# Altium PCB PCB.PcbDoc (part 7 of 11)
Units mm, origin at the board's own origin, x right, y up, seen from the top; angles counter-clockwise.
Board outline 100.46 x 70.51 mm, 10 copper layers (L1(SIG), L2(GND), L3(PWR), L4(SIG), L5(GND), L6(SIG), L7(GND), L8(SIG), L9(GND), L10(SIG)), stack 1.49 mm thick; 425 components, 324 nets, 2004 pads, 1425 vias.
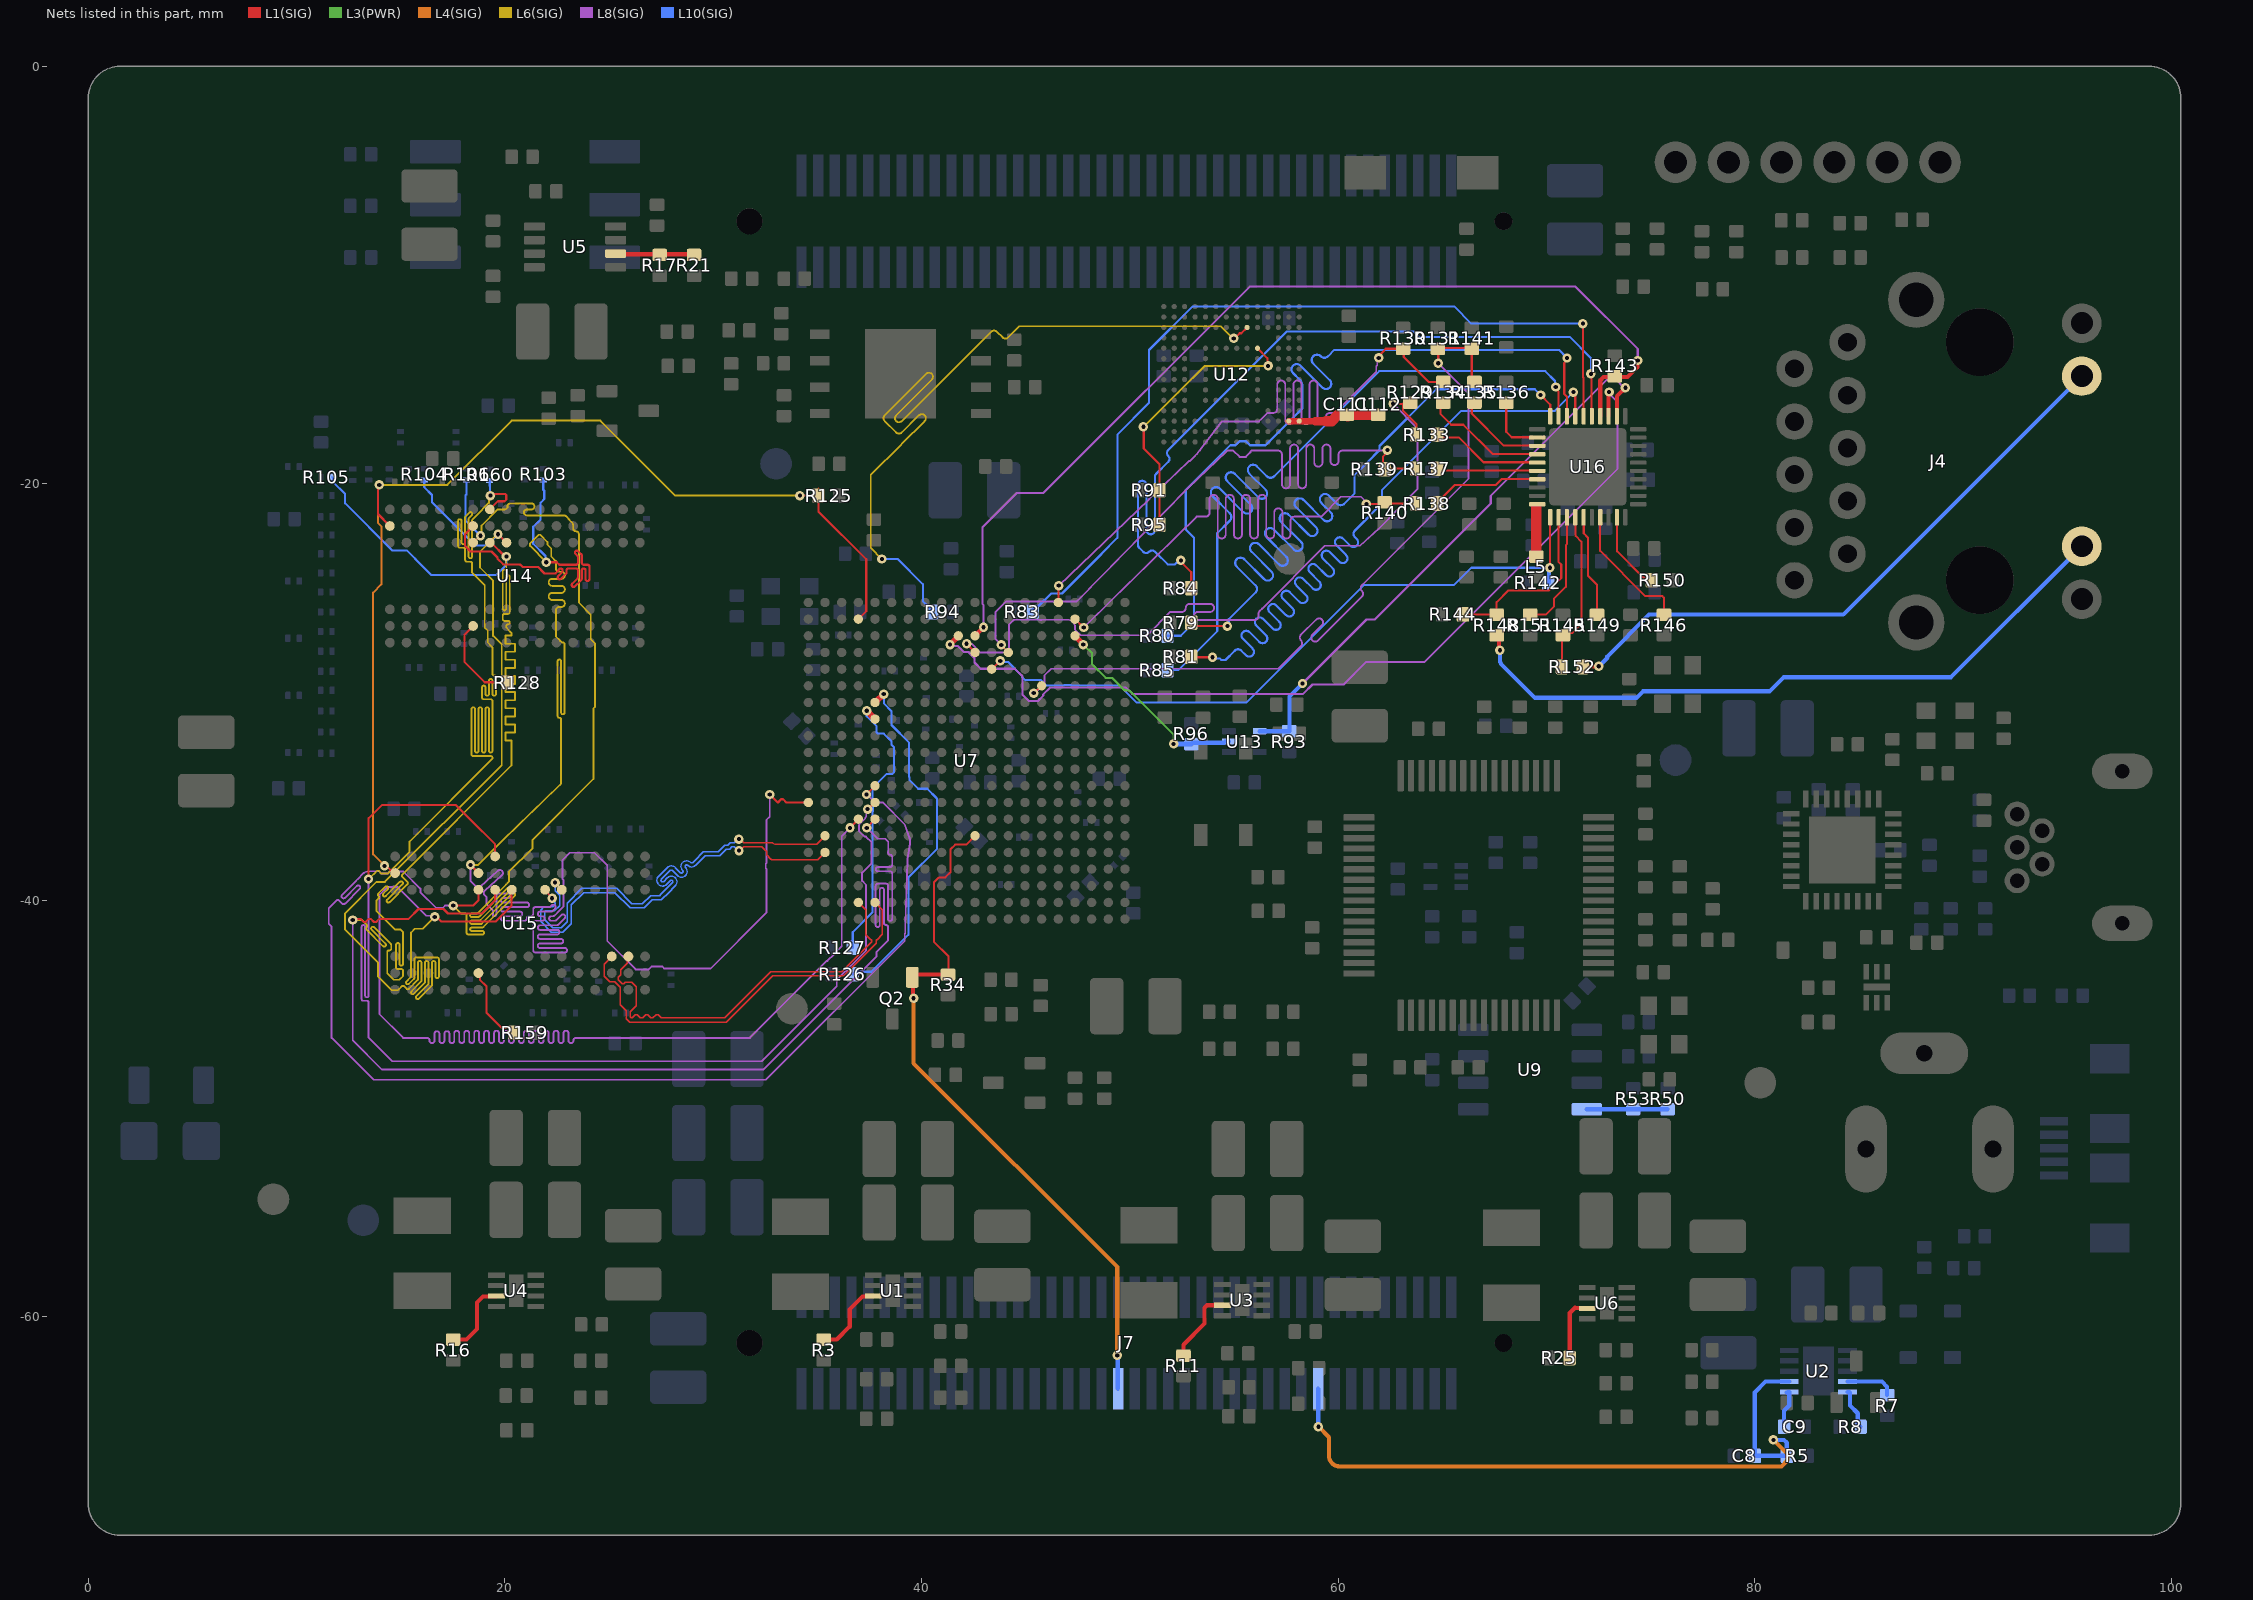
[diagram p14: the nets of this part, all layers, seen from the top]

## Via types
v1: diameter 0.45, hole 0.2, L1(SIG) to L10(SIG), tented both sides, 1194 vias
v2: diameter 0.45, hole 0.2, L1(SIG) to L10(SIG), 211 vias
v3: diameter 0.6, hole 0.25, L1(SIG) to L10(SIG), 9 vias
v4: diameter 0, hole 0.2, L1(SIG) to L10(SIG), tented both sides, 6 vias
v5: diameter 5, hole 3.2, L1(SIG) to L10(SIG), tented both sides, 4 vias
v6: diameter 0.45/0.45/0.45/0.45/0.45/0.45/0.45/0.45/0.45/0.45 (per signal layer), hole 0.2, L1(SIG) to L10(SIG), tented both sides, 1 vias

## Nets (pads, with @x,y where several pads share a name; then routed paths per layer and width w, separated by ;. In a path a pad name is that pad's centre, name@x,y a point inside that pad or via, vN(x,y) a via of type N, cw(c..) or ccw(c..) an arc to the next point about the centre after c; other vN are vias at no path point) (continued)
DDR_DQS2_N: U7.T2 U15.G3 | length 22.1
  L1(SIG) w0.069: U15.G3@21.933,-39.501 21.933,-39.54 22.267,-39.874 v1(22.267,-39.913) ; v1(31.243,-37.622) 31.295,-37.622 31.473,-37.445 32.326,-37.445 32.561,-37.68 32.561,-37.821 32.772,-38.031 32.785,-38.031 32.822,-38.069 35.011,-38.069 U7.T2@35.37,-37.71
  L10(SIG) w0.069: v1(22.267,-39.913) 22.267,-39.988 22.423,-40.144 22.423,-40.201 22.299,-40.324 21.872,-40.324 21.717,-40.479 21.717,-41.025 22.225,-41.533 22.778,-41.533 23.183,-41.128 23.183,-40.233 23.781,-39.634 25.279,-39.634 26.022,-40.376 26.683,-40.376 27.074,-39.986 27.505,-39.986 27.563,-39.929 27.833,-39.658 28.185,-39.307 ccw(c27.995,-39.115) 28.236,-38.994 ccw(c27.995,-39.115) 27.804,-38.924 27.622,-39.106 cw(c27.57,-39.053) 27.517,-39.106 cw(c27.57,-39.053) 27.517,-39 27.942,-38.575 cw(c27.995,-38.628) 28.047,-38.575 28.291,-38.82 ccw(c28.482,-38.628) 28.672,-38.82 ccw(c28.482,-38.628) 28.674,-38.438 ccw(c28.604,-38.507) 28.673,-38.437 cw(c28.725,-38.384) 28.672,-38.332 cw(c28.725,-38.384) 28.777,-38.331 ccw(c28.969,-38.141) 29.16,-38.332 29.253,-38.238 29.617,-37.874 30.315,-37.874 30.63,-37.559 30.788,-37.559 30.901,-37.447 31.012,-37.447 31.183,-37.617 v1@31.238,-37.617
DDR_DQS2_P: U7.R2 U15.F3 | length 22.2
  L1(SIG) w0.069: v1(22.412,-39.159) 22.412,-39.17 22.733,-39.491 U15.F3@22.733,-39.501 ; v1(31.237,-37.072) 31.29,-37.072 31.467,-37.249 32.856,-37.249 ccw(c33.059,-36.952) 32.869,-37.258 32.946,-37.313 34.967,-37.313 U7.R2@35.37,-36.91
  L10(SIG) w0.069: v1(22.412,-39.159) 22.412,-39.55 22.626,-39.764 22.626,-40.274 22.38,-40.52 21.953,-40.52 21.913,-40.56 21.913,-40.944 22.306,-41.337 22.697,-41.337 22.987,-41.047 22.987,-40.152 23.7,-39.438 25.36,-39.438 26.103,-40.181 26.602,-40.181 26.993,-39.79 27.424,-39.79 27.489,-39.725 28.047,-39.168 ccw(c27.995,-39.115) 28.061,-39.082 ccw(c27.995,-39.115) 27.942,-39.062 27.761,-39.243 cw(c27.57,-39.053) 27.379,-39.244 cw(c27.57,-39.053) 27.35,-38.896 27.35,-38.891 27.804,-38.437 cw(c27.995,-38.628) 28.185,-38.437 28.429,-38.681 ccw(c28.482,-38.628) 28.534,-38.681 ccw(c28.482,-38.628) 28.534,-38.576 cw(c28.725,-38.384) 28.533,-38.194 cw(c28.725,-38.384) 28.914,-38.192 cw(c28.846,-38.262) 28.916,-38.193 ccw(c28.969,-38.141) 29.021,-38.193 29.115,-38.1 29.536,-37.679 30.234,-37.679 30.549,-37.364 30.707,-37.364 30.82,-37.251 31.009,-37.251 31.165,-37.096 31.165,-37.072 v1(31.237,-37.072)
DDR_DQS3_N: U7.W4 U15.B7 | length 19.6
  L1(SIG) w0.069: U15.B7@25.933,-42.701 25.873,-42.761 25.873,-43.039 25.564,-43.348 25.564,-43.592 25.453,-43.702 25.453,-43.822 25.643,-44.011 25.7,-44.011 25.78,-43.931 26.086,-43.931 26.302,-44.148 26.302,-44.856 26.302,-45.071 26.022,-45.351 26.022,-45.601 26.075,-45.655 26.109,-45.655 26.259,-45.505 26.359,-45.505 26.509,-45.655 26.609,-45.655 26.759,-45.505 26.859,-45.505 27.009,-45.655 27.109,-45.655 27.259,-45.505 27.359,-45.505 27.509,-45.655 27.544,-45.655 30.549,-45.655 32.77,-43.434 36.181,-43.434 37.625,-41.989 37.625,-41.932 37.585,-41.892 37.57,-41.892 37.329,-41.651 37.329,-40.469 U7.W4@36.97,-40.11
DDR_DQS3_P: U7.W5 U15.C7 | length 19.6
  L1(SIG) w0.069: U15.C7@25.133,-42.701 24.764,-43.07 24.764,-43.654 25.026,-43.916 25.271,-43.916 25.533,-44.178 25.533,-45.015 25.826,-45.308 25.826,-45.683 25.994,-45.851 27.544,-45.851 30.63,-45.851 32.851,-43.63 36.262,-43.63 37.821,-42.07 37.821,-41.932 37.861,-41.892 37.868,-41.892 38.129,-41.63 38.129,-40.469 U7.W5@37.77,-40.11
DDR_NCAS: R105.1 U7.P5 U14.K3 U15.K3 | length 119.7
  L1(SIG) w0.103: v1(12.697,-40.951) 12.75,-40.898 12.967,-40.898 13.069,-40.898 13.219,-41.048 13.319,-41.048 13.469,-40.898 13.569,-40.898 13.719,-41.048 13.819,-41.048 13.969,-40.898 14.097,-40.898 15.379,-40.898 15.854,-40.423 17.051,-40.423 17.272,-40.644 18.884,-40.644 19.533,-39.995 U15.K3@19.533,-39.501 ; U14.K3@19.279,-22.839 19.342,-22.839 20.009,-23.505 v1(20.073,-23.505) ; v1(37.37,-36.532) 37.37,-36.521 37.759,-36.132 U7.P5@37.759,-36.11
  L6(SIG) w0.088: v1(12.697,-40.951) 13.134,-40.951 13.335,-41.152 13.366,-41.183 cw(c13.307,-41.242) 13.366,-41.301 ccw(c13.425,-41.36) 13.365,-41.419 14.151,-42.205 ccw(c14.21,-42.146) 14.27,-42.205 ccw(c14.21,-42.145) 14.27,-42.086 13.603,-41.42 cw(c13.662,-41.36) 13.603,-41.301 cw(c13.662,-41.36) 13.721,-41.301 14.521,-42.101 cw(c14.462,-42.16) 14.546,-42.16 14.546,-42.328 cw(c14.462,-42.328) 14.462,-42.412 14.435,-42.412 ccw(c14.435,-42.496) 14.351,-42.496 14.351,-42.54 14.351,-43.516 14.656,-43.822 14.729,-43.822 14.732,-43.819 14.935,-43.819 15.113,-43.64 15.113,-43.438 15.113,-43.394 ccw(c15.029,-43.394) 15.029,-43.31 14.862,-43.31 cw(c14.862,-43.226) 14.778,-43.226 14.778,-42.142 cw(c14.862,-42.142) 14.862,-42.058 cw(c14.862,-42.142) 14.945,-42.142 14.945,-43.059 ccw(c15.029,-43.059) 15.029,-43.142 ccw(c15.029,-43.059) 15.113,-43.059 15.113,-42.014 15.113,-41.533 14.986,-41.406 14.718,-41.406 13.843,-40.53 13.843,-40.009 13.902,-39.95 13.933,-39.919 ccw(c13.873,-39.86) 13.932,-39.8 cw(c13.992,-39.741) 13.932,-39.682 14.258,-39.356 cw(c14.318,-39.416) 14.377,-39.356 cw(c14.318,-39.416) 14.377,-39.475 14.169,-39.682 ccw(c14.229,-39.741) 14.17,-39.801 ccw(c14.229,-39.741) 14.288,-39.801 14.965,-39.124 cw(c15.024,-39.183) 15.083,-39.124 cw(c15.024,-39.183) 15.083,-39.243 14.351,-39.975 ccw(c14.41,-40.034) 14.351,-40.093 ccw(c14.41,-40.034) 14.469,-40.093 15.32,-39.242 ccw(c15.261,-39.183) 15.321,-39.125 15.083,-38.887 cw(c15.142,-38.828) 15.083,-38.769 15.114,-38.738 20.32,-33.532 20.32,-32.383 20.32,-32.339 20.035,-32.339 20.035,-31.952 20.481,-31.952 20.481,-31.564 20.035,-31.564 20.035,-31.177 20.481,-31.177 20.481,-30.789 20.035,-30.789 20.035,-30.401 20.481,-30.401 20.481,-30.014 20.035,-30.014 20.035,-29.626 20.481,-29.626 20.481,-29.239 20.035,-29.239 20.035,-28.851 20.481,-28.851 20.481,-28.463 20.035,-28.463 20.035,-28.076 20.481,-28.076 20.481,-27.688 20.032,-27.688 20.032,-27.301 20.32,-27.301 20.32,-27.182 20.295,-27.157 20.244,-27.105 20.089,-26.917 ccw(c19.804,-27.151) 20.066,-26.891 20.066,-26.889 20.066,-26.846 cw(c20.15,-26.846) 20.15,-26.762 ccw(c20.15,-26.678) 20.234,-26.678 ccw(c20.15,-26.678) 20.15,-26.594 19.982,-26.594 cw(c19.982,-26.51) 19.898,-26.51 19.898,-26.343 cw(c19.982,-26.343) 19.982,-26.259 20.15,-26.259 ccw(c20.15,-26.175) 20.234,-26.175 20.234,-24.486 ccw(c20.15,-24.486) 20.15,-24.402 ccw(c20.15,-24.486) 20.066,-24.486 20.066,-26.008 cw(c19.982,-26.008) 19.982,-26.091 cw(c19.982,-26.008) 19.898,-26.008 19.898,-24.222 cw(c19.982,-24.222) 19.982,-24.139 ccw(c19.982,-24.055) 20.066,-24.055 20.066,-24.011 20.066,-23.512 v1(20.073,-23.505)
  L8(SIG) w0.088: v1(12.697,-40.951) 12.697,-46.731 14.102,-48.137 32.409,-48.137 37.846,-42.7 37.846,-42.485 38.396,-41.934 38.396,-41.335 38.396,-41.291 ccw(c38.297,-41.291) 38.297,-41.192 cw(c38.297,-41.093) 38.198,-41.093 38.198,-39.506 ccw(c38.099,-39.506) 38.099,-39.407 ccw(c38.099,-39.506) 38,-39.506 38,-41.192 cw(c37.901,-41.192) 37.901,-41.291 cw(c37.901,-41.192) 37.802,-41.192 37.802,-39.308 cw(c37.901,-39.308) 37.901,-39.209 38.297,-39.209 cw(c38.297,-39.308) 38.396,-39.308 38.396,-40.895 ccw(c38.496,-40.895) 38.496,-40.994 ccw(c38.496,-40.895) 38.595,-40.895 38.595,-38.713 ccw(c38.496,-38.713) 38.496,-38.614 37.901,-38.614 cw(c37.901,-38.515) 37.901,-38.416 38.496,-38.416 ccw(c38.496,-38.317) 38.595,-38.317 38.595,-37.92 ccw(c38.496,-37.92) 38.496,-37.821 cw(c38.496,-37.722) 38.396,-37.722 38.396,-37.678 ; v1(37.37,-36.532) 37.891,-37.053 38.257,-37.053 38.408,-37.204 38.408,-37.667 38.396,-37.679
  L10(SIG) w0.103: R105.1@11.708,-19.691 11.761,-19.745 11.761,-19.932 12.332,-20.504 12.332,-20.945 14.607,-23.22 15.309,-23.22 15.697,-23.608 15.697,-23.622 16.458,-24.383 19.596,-24.383 20.066,-23.913 20.066,-23.512 v1(20.073,-23.505)
DDR_NCS: R103.1 U7.N1 U14.L2 U15.L2 | length 107.2
  L1(SIG) w0.103: v1(18.348,-38.308) 18.348,-38.312 18.733,-38.696 U15.L2@18.733,-38.701 ; U14.L2@18.479,-22.039 18.092,-22.425 18.092,-22.999 18.354,-23.26 19.359,-23.26 19.649,-23.551 19.649,-23.614 19.917,-23.882 19.98,-23.882 19.982,-23.884 20.73,-23.884 20.848,-24.002 21.589,-24.002 21.857,-24.27 21.893,-24.307 ccw(c21.951,-24.235) 21.95,-24.327 22.383,-24.327 ccw(c22.383,-24.235) 22.448,-24.3 22.565,-24.183 ccw(c22.5,-24.119) 22.578,-24.166 22.603,-24.125 cw(c22.682,-24.172) 22.683,-24.081 cw(c22.683,-24.172) 22.775,-24.172 22.775,-24.195 cw(c22.683,-24.195) 22.748,-24.259 22.564,-24.443 ccw(c22.629,-24.508) 22.564,-24.572 ccw(c22.629,-24.508) 22.694,-24.573 22.931,-24.335 ccw(c22.866,-24.271) 22.958,-24.271 22.958,-24.172 cw(c23.05,-24.172) 23.05,-24.081 23.417,-24.081 cw(c23.417,-24.172) 23.508,-24.172 23.508,-24.499 cw(c23.417,-24.499) 23.482,-24.563 23.239,-24.806 ccw(c23.304,-24.871) 23.239,-24.935 ccw(c23.304,-24.871) 23.369,-24.935 23.665,-24.639 ccw(c23.6,-24.574) 23.692,-24.574 23.692,-24.172 cw(c23.783,-24.172) 23.783,-24.081 cw(c23.783,-24.172) 23.875,-24.172 23.875,-24.589 ccw(c23.967,-24.589) 23.967,-24.681 ccw(c23.967,-24.589) 24.059,-24.589 24.059,-23.989 ccw(c23.967,-23.989) 23.967,-23.897 23.783,-23.897 cw(c23.783,-23.806) 23.692,-23.806 23.692,-23.459 ccw(c23.6,-23.459) 23.665,-23.394 23.52,-23.249 ccw(c23.454,-23.313) 23.39,-23.248 ccw(c23.454,-23.313) 23.389,-23.378 23.482,-23.47 cw(c23.417,-23.535) 23.508,-23.535 23.508,-23.806 cw(c23.417,-23.806) 23.417,-23.897 22.65,-23.897 cw(c22.65,-23.806) 22.585,-23.87 22.535,-23.82 22.498,-23.784 22.492,-23.777 v1(21.989,-23.777) ; v1(32.717,-34.927) 32.813,-35.022 33.1,-35.31 33.11,-35.31 33.26,-35.16 33.36,-35.16 33.51,-35.31 34.29,-35.31 U7.N1@34.57,-35.31
  L6(SIG) w0.088: v1(18.348,-38.308) 18.713,-38.308 19.871,-37.15 22.649,-34.466 22.7,-34.414 22.7,-31.373 22.7,-31.329 ccw(c22.617,-31.329) 22.617,-31.245 cw(c22.617,-31.161) 22.533,-31.161 22.533,-28.533 cw(c22.617,-28.533) 22.617,-28.449 cw(c22.617,-28.533) 22.7,-28.533 22.7,-30.994 ccw(c22.784,-30.994) 22.784,-31.077 ccw(c22.784,-30.994) 22.868,-30.994 22.868,-27.715 ccw(c22.784,-27.715) 22.784,-27.632 22.77,-27.632 cw(c22.77,-27.548) 22.709,-27.605 22.678,-27.572 ccw(c22.617,-27.629) 22.676,-27.57 22.668,-27.561 22.637,-27.53 22.449,-27.343 22.449,-26.504 22.449,-26.095 cw(c22.618,-26.095) 22.618,-25.926 22.714,-25.926 ccw(c22.714,-25.757) 22.714,-25.588 22.272,-25.588 cw(c22.272,-25.42) 22.272,-25.251 22.714,-25.251 ccw(c22.714,-25.082) 22.714,-24.913 22.272,-24.913 cw(c22.272,-24.744) 22.272,-24.576 22.714,-24.576 ccw(c22.714,-24.407) 22.714,-24.238 22.618,-24.238 cw(c22.618,-24.069) 22.449,-24.069 22.449,-24.025 ; v1(21.989,-23.777) 21.209,-22.997 21.209,-22.864 21.617,-22.455 21.69,-22.455 22.047,-22.813 22.047,-22.94 22.225,-23.118 22.225,-23.502 22.449,-23.726 22.449,-24.017
  L8(SIG) w0.088: v1(18.348,-38.308) 18.348,-38.593 18.348,-39.074 18.622,-39.348 ccw(c18.724,-39.246) 18.821,-39.353 19.665,-38.59 cw(c19.762,-38.697) 19.869,-38.6 cw(c19.762,-38.697) 19.859,-38.804 19.036,-39.547 ccw(c19.132,-39.654) 19.03,-39.756 19.115,-39.84 19.115,-40.194 19.126,-40.205 19.438,-40.517 ; 19.169,-40.248 19.438,-40.517 ; v1(32.717,-34.927) 32.717,-35.994 32.558,-36.153 32.558,-38.221 32.522,-38.256 32.522,-38.459 32.558,-38.494 32.558,-40.598 32.532,-40.624 29.872,-43.284 27.659,-43.284 27.569,-43.193 27.041,-43.193 26.912,-43.323 26.276,-43.323 24.916,-41.962 24.916,-38.334 24.304,-37.723 23.114,-37.723 22.772,-38.065 22.772,-38.997 22.808,-39.033 22.808,-40.315 22.782,-40.341 22.669,-40.453 22.638,-40.484 22.384,-40.739 cw(c22.307,-40.661) 22.307,-40.771 22.231,-40.771 ccw(c22.231,-40.88) 22.231,-40.989 22.397,-40.989 ccw(c22.397,-40.88) 22.474,-40.957 22.716,-40.715 cw(c22.793,-40.793) 22.87,-40.87 22.565,-41.175 cw(c22.488,-41.098) 22.488,-41.207 21.69,-41.207 ccw(c21.69,-41.316) 21.69,-41.425 22.514,-41.425 cw(c22.514,-41.535) 22.514,-41.644 21.69,-41.644 ccw(c21.69,-41.753) 21.69,-41.862 22.695,-41.862 cw(c22.695,-41.971) 22.804,-41.971 cw(c22.695,-41.971) 22.695,-42.08 21.69,-42.08 ccw(c21.69,-42.189) 21.581,-42.189 ccw(c21.69,-42.189) 21.69,-42.298 22.876,-42.298 cw(c22.876,-42.408) 22.985,-42.408 cw(c22.876,-42.408) 22.876,-42.517 21.471,-42.517 cw(c21.471,-42.408) 21.362,-42.408 21.362,-41.098 cw(c21.471,-41.098) 21.471,-40.989 21.794,-40.989 ccw(c21.794,-40.88) 21.794,-40.771 21.69,-40.771 cw(c21.69,-40.661) 21.69,-40.552 22.216,-40.552 ccw(c22.216,-40.443) 22.293,-40.521 22.326,-40.488 22.407,-40.407 ccw(c22.33,-40.33) 22.253,-40.252 22.203,-40.302 cw(c22.126,-40.225) 22.126,-40.334 21.471,-40.334 ccw(c21.471,-40.443) 21.362,-40.443 21.362,-40.661 cw(c21.253,-40.661) 21.253,-40.771 21.209,-40.771 21.165,-40.771 ccw(c21.165,-40.88) 21.056,-40.88 cw(c20.947,-40.88) 20.947,-40.989 19.919,-40.989 cw(c19.919,-40.88) 19.919,-40.771 20.728,-40.771 ccw(c20.728,-40.661) 20.728,-40.552 19.919,-40.552 cw(c19.919,-40.443) 19.81,-40.443 cw(c19.919,-40.443) 19.919,-40.334 21.056,-40.334 ccw(c21.056,-40.225) 21.165,-40.225 ccw(c21.056,-40.225) 21.056,-40.116 19.919,-40.116 cw(c19.919,-40.007) 19.919,-39.898 20.164,-39.898 ccw(c20.164,-39.788) 20.274,-39.788 ccw(c20.164,-39.788) 20.164,-39.679 19.701,-39.679 ccw(c19.701,-39.788) 19.592,-39.788 19.592,-40.661 cw(c19.483,-40.661) 19.483,-40.771 19.438,-40.771 19.438,-40.517
  L10(SIG) w0.103: R103.1@21.844,-19.837 21.844,-20.297 21.894,-20.347 21.894,-20.746 21.717,-20.923 21.717,-21.724 21.366,-22.075 21.366,-22.895 21.953,-23.482 21.953,-23.741 v1(21.989,-23.777)
DDR_NRAS: R104.1 U7.P4 U14.J3 U15.J3 | length 111.1
  L1(SIG) w0.103: v1(16.632,-40.803) 16.726,-40.803 16.948,-41.025 19.558,-41.025 20.326,-40.256 20.326,-39.507 U15.J3@20.333,-39.501 ; v1@19.679,-22.439 U14.J3@20.079,-22.839 ; v1(36.57,-36.532) 36.57,-36.521 36.959,-36.132 U7.P4@36.959,-36.11
  L6(SIG) w0.088: v1(16.632,-40.803) 16.062,-41.373 15.68,-41.373 15.494,-41.558 15.494,-42.625 15.494,-43.651 cw(c15.41,-43.651) 15.47,-43.71 15.282,-43.898 ccw(c15.341,-43.957) 15.282,-44.017 ccw(c15.341,-43.957) 15.4,-44.016 15.637,-43.779 ccw(c15.578,-43.72) 15.662,-43.72 15.662,-42.836 cw(c15.745,-42.836) 15.745,-42.753 16.751,-42.753 cw(c16.751,-42.836) 16.835,-42.836 16.835,-43.662 cw(c16.751,-43.662) 16.751,-43.745 cw(c16.751,-43.662) 16.667,-43.662 16.667,-43.004 ccw(c16.583,-43.004) 16.583,-42.92 ccw(c16.583,-43.004) 16.5,-43.004 16.5,-44.067 cw(c16.416,-44.067) 16.475,-44.126 15.874,-44.727 cw(c15.815,-44.668) 15.756,-44.727 cw(c15.815,-44.668) 15.756,-44.609 16.308,-44.057 ccw(c16.248,-43.998) 16.332,-43.998 16.332,-43.004 ccw(c16.248,-43.004) 16.248,-42.92 ccw(c16.248,-43.004) 16.164,-43.004 16.164,-43.928 cw(c16.081,-43.928) 16.14,-43.987 15.637,-44.49 cw(c15.578,-44.431) 15.519,-44.49 cw(c15.578,-44.431) 15.519,-44.372 15.972,-43.918 ccw(c15.913,-43.859) 15.997,-43.859 15.997,-43.004 ccw(c15.913,-43.004) 15.913,-42.92 ccw(c15.913,-43.004) 15.829,-43.004 15.829,-43.79 cw(c15.745,-43.79) 15.805,-43.849 15.4,-44.253 cw(c15.341,-44.194) 15.282,-44.254 15.166,-44.137 ccw(c15.107,-44.197) 15.048,-44.138 15.017,-44.169 14.859,-44.327 14.567,-44.327 13.917,-43.677 13.917,-43.004 12.328,-41.415 12.328,-40.634 13.838,-39.125 14.243,-39.125 19.848,-33.52 19.848,-27.725 19.435,-27.313 19.435,-24.659 18.808,-24.032 18.808,-23.274 19.644,-22.439 v1(19.671,-22.439)
  L8(SIG) w0.088: v1(16.632,-40.803) 16.575,-40.745 16.231,-40.745 14.859,-39.374 14.351,-39.374 13.982,-39.743 13.982,-45.481 15.113,-46.613 16.048,-46.613 16.264,-46.613 cw(c16.264,-46.732) 16.383,-46.732 16.383,-46.741 ccw(c16.503,-46.741) 16.622,-46.741 16.622,-46.412 cw(c16.741,-46.412) 16.86,-46.412 16.86,-46.741 ccw(c16.979,-46.741) 17.098,-46.741 17.098,-46.409 cw(c17.217,-46.409) 17.337,-46.409 17.337,-46.741 ccw(c17.456,-46.741) 17.575,-46.741 17.575,-46.387 cw(c17.694,-46.387) 17.813,-46.387 17.813,-46.741 ccw(c17.932,-46.741) 18.051,-46.741 18.051,-46.387 cw(c18.17,-46.387) 18.29,-46.387 18.29,-46.741 ccw(c18.409,-46.741) 18.528,-46.741 18.528,-46.387 cw(c18.647,-46.387) 18.766,-46.387 18.766,-46.741 ccw(c18.885,-46.741) 19.004,-46.741 19.004,-46.387 cw(c19.124,-46.387) 19.243,-46.387 19.243,-46.741 ccw(c19.362,-46.741) 19.481,-46.741 19.481,-46.387 cw(c19.6,-46.387) 19.719,-46.387 19.719,-46.741 ccw(c19.838,-46.741) 19.957,-46.741 19.957,-46.387 cw(c20.077,-46.387) 20.196,-46.387 20.196,-46.741 ccw(c20.315,-46.741) 20.434,-46.741 20.434,-46.387 cw(c20.553,-46.387) 20.672,-46.387 20.672,-46.741 ccw(c20.791,-46.741) 20.911,-46.741 20.911,-46.387 cw(c21.03,-46.387) 21.149,-46.387 21.149,-46.741 ccw(c21.268,-46.741) 21.387,-46.741 21.387,-46.387 cw(c21.506,-46.387) 21.625,-46.387 21.625,-46.741 ccw(c21.744,-46.741) 21.864,-46.741 21.864,-46.387 cw(c21.983,-46.387) 22.102,-46.387 22.102,-46.741 ccw(c22.221,-46.741) 22.34,-46.741 22.34,-46.387 cw(c22.459,-46.387) 22.578,-46.387 22.578,-46.741 ccw(c22.698,-46.741) 22.817,-46.741 22.817,-46.387 cw(c22.936,-46.387) 23.055,-46.387 23.055,-46.741 ccw(c23.174,-46.741) 23.293,-46.741 23.293,-46.732 cw(c23.412,-46.732) 23.412,-46.613 23.456,-46.613 31.762,-46.613 35.459,-42.916 35.487,-42.916 35.814,-42.589 35.814,-42.561 36.172,-42.203 36.172,-36.93 v1(36.57,-36.532)
  L10(SIG) w0.103: R104.1@16.129,-19.837 16.129,-20.172 16.506,-20.549 16.506,-20.9 18.584,-22.978 19.131,-22.978 v1(19.671,-22.439)
DDR_NRST: R125.1 U7.B4 U14.T2 U15.T2 | length 52.9
  L1(SIG) w0.103: v1(13.97,-20.066) 13.906,-20.13 13.906,-21.466 U14.T2@14.479,-22.039 ; v1(14.224,-38.354) 14.305,-38.354 14.652,-38.701 U15.T2@14.733,-38.701 ; v1(34.163,-20.578) R125.1@35.06,-20.578 ; R125.1@35.06,-20.253 R125.1@35.06,-20.578 ; U7.B4@36.97,-26.51 37.347,-26.133 37.347,-23.634 35.06,-21.348 R125.1@35.06,-20.578
  L4(SIG) w0.092: v1(13.97,-20.066) 13.906,-20.13 13.906,-21.889 14.071,-22.054 14.071,-24.844 13.675,-25.24 13.675,-37.805 v1(14.224,-38.354)
  L6(SIG) w0.088: v1(13.97,-20.066) 17.239,-20.066 20.326,-16.979 24.586,-16.979 28.184,-20.578 v1(34.163,-20.578)
DDR_NWE: R106.1 U7.M5 U14.L3 U15.L3 | length 104.7
  L1(SIG) w0.103: v1(17.526,-40.263) 17.53,-40.258 18.484,-40.258 18.733,-40.01 U15.L3@18.733,-39.501 ; U14.L3@18.479,-22.839 18.487,-22.839 18.82,-22.506 v1(18.829,-22.506) ; v1(37.364,-34.925) 37.364,-34.921 37.759,-34.526 U7.M5@37.759,-34.51
  L6(SIG) w0.088: v1(17.526,-40.263) 17.907,-40.644 18.035,-40.644 18.079,-40.644 cw(c18.079,-40.727) 18.163,-40.727 18.163,-41.565 ccw(c18.246,-41.565) 18.246,-41.649 18.922,-41.649 ccw(c18.922,-41.565) 19.006,-41.565 ccw(c18.922,-41.565) 18.922,-41.482 18.414,-41.482 cw(c18.414,-41.398) 18.33,-41.398 cw(c18.414,-41.398) 18.414,-41.314 18.912,-41.314 ccw(c18.912,-41.23) 18.971,-41.29 20.471,-39.79 ccw(c20.412,-39.73) 20.471,-39.671 ccw(c20.412,-39.73) 20.353,-39.671 18.902,-41.122 cw(c18.843,-41.063) 18.843,-41.146 18.414,-41.146 cw(c18.414,-41.063) 18.33,-41.063 cw(c18.414,-41.063) 18.414,-40.979 18.773,-40.979 ccw(c18.773,-40.895) 18.832,-40.955 20.234,-39.552 ccw(c20.175,-39.493) 20.234,-39.434 ccw(c20.175,-39.493) 20.116,-39.434 18.763,-40.787 cw(c18.704,-40.727) 18.704,-40.811 18.414,-40.811 cw(c18.414,-40.727) 18.33,-40.727 cw(c18.414,-40.727) 18.414,-40.644 18.634,-40.644 ccw(c18.634,-40.56) 18.693,-40.619 20.056,-39.256 20.147,-39.166 20.193,-39.12 20.193,-38.644 21.335,-37.502 21.335,-37.102 24.257,-34.18 24.257,-30.793 24.321,-30.729 24.321,-27.669 24.127,-27.475 24.127,-26.29 23.558,-25.721 23.558,-22.483 23.558,-22.439 ccw(c23.415,-22.439) 23.424,-22.295 23.415,-22.295 cw(c23.424,-22.151) 23.28,-22.151 23.28,-21.993 ccw(c23.137,-21.993) 23.239,-21.891 23.105,-21.758 cw(c23.207,-21.657) 23.092,-21.743 23.056,-21.694 ccw(c22.941,-21.781) 23.042,-21.679 22.937,-21.574 ccw(c22.836,-21.676) 22.836,-21.532 21.061,-21.532 cw(c21.061,-21.388) 20.917,-21.388 cw(c21.061,-21.388) 21.061,-21.244 21.277,-21.244 ccw(c21.277,-21.101) 21.421,-21.101 ccw(c21.277,-21.101) 21.277,-20.957 20.27,-20.957 ccw(c20.27,-21.101) 20.127,-21.101 cw(c19.983,-21.101) 19.983,-21.244 19.939,-21.244 19.653,-21.244 18.879,-22.019 18.879,-22.455 v1(18.829,-22.506)
  L8(SIG) w0.088: v1(17.526,-40.263) 17.128,-40.263 17.013,-40.377 16.708,-40.377 15.944,-39.614 15.944,-39.443 15.151,-38.649 15.125,-38.623 14.479,-38.621 14.377,-38.723 14.071,-38.723 13.967,-38.619 13.458,-38.617 ccw(c13.455,-38.986) 13.187,-38.732 12.953,-38.979 12.853,-39.079 12.822,-39.11 12.188,-39.744 ccw(c12.258,-39.814) 12.188,-39.885 ccw(c12.258,-39.814) 12.328,-39.885 12.892,-39.321 cw(c12.962,-39.391) 13.032,-39.321 cw(c12.962,-39.391) 13.033,-39.461 12.328,-40.165 cw(c12.258,-40.095) 12.188,-40.165 12.048,-40.024 ccw(c11.978,-40.095) 11.908,-40.025 11.877,-40.056 11.543,-40.389 11.543,-41.131 11.684,-41.271 11.684,-46.613 13.696,-48.625 32.532,-48.625 39.171,-41.986 39.196,-41.96 39.333,-38.117 ccw(c38.964,-38.104) 39.332,-38.075 39.332,-38.072 39.332,-38.043 39.454,-37.285 39.454,-37.082 39.196,-36.368 38.138,-35.31 37.748,-35.31 v1(37.364,-34.925)
  L10(SIG) w0.103: R106.1@18.161,-19.837 18.156,-19.841 18.156,-20.524 18.117,-20.564 18.117,-21.794 v1(18.829,-22.506)
DDR_ODT: R160.1 U7.N5 U14.K1 U15.K1 | length 111.8
  L1(SIG) w0.103: v1(13.455,-38.986) 13.462,-38.979 13.462,-36.072 14.097,-35.437 17.653,-35.437 18.352,-36.135 19.533,-37.317 U15.K1@19.533,-37.901 ; U14.K1@19.292,-21.226 U14.K1@19.279,-21.239 19.666,-20.852 19.985,-20.852 20.066,-20.771 20.066,-20.56 20.005,-20.5 19.538,-20.5 19.526,-20.511 19.37,-20.511 v1(19.304,-20.578) ; v1(37.416,-35.632) 37.431,-35.632 37.754,-35.31 U7.N5@37.759,-35.31
  L6(SIG) w0.088: v1(13.455,-38.986) 13.745,-38.709 13.862,-38.592 13.941,-38.592 14.071,-38.723 14.377,-38.723 15.428,-37.671 15.428,-37.184 19.405,-33.207 19.405,-33.163 ccw(c19.321,-33.163) 19.321,-33.08 18.483,-33.08 cw(c18.483,-32.996) 18.399,-32.996 18.399,-30.826 cw(c18.483,-30.826) 18.483,-30.742 cw(c18.483,-30.826) 18.567,-30.826 18.567,-32.828 ccw(c18.651,-32.828) 18.651,-32.912 ccw(c18.651,-32.828) 18.734,-32.828 18.734,-30.826 cw(c18.818,-30.826) 18.818,-30.742 cw(c18.818,-30.826) 18.902,-30.826 18.902,-32.828 ccw(c18.986,-32.828) 18.986,-32.912 ccw(c18.986,-32.828) 19.07,-32.828 19.07,-30.826 cw(c19.153,-30.826) 19.153,-30.742 cw(c19.153,-30.826) 19.237,-30.826 19.237,-32.828 ccw(c19.321,-32.828) 19.321,-32.912 ccw(c19.321,-32.828) 19.405,-32.828 19.405,-30.698 19.405,-30.484 19.405,-30.44 ccw(c19.321,-30.44) 19.321,-30.356 18.986,-30.356 cw(c18.986,-30.272) 18.902,-30.272 18.902,-29.785 cw(c18.986,-29.785) 18.986,-29.701 cw(c18.986,-29.785) 19.07,-29.785 19.07,-30.105 ccw(c19.153,-30.105) 19.153,-30.188 ccw(c19.153,-30.105) 19.237,-30.105 19.237,-29.466 cw(c19.321,-29.466) 19.321,-29.382 cw(c19.321,-29.466) 19.405,-29.466 19.405,-30.105 ccw(c19.489,-30.105) 19.489,-30.188 ccw(c19.489,-30.105) 19.572,-30.105 19.572,-29.298 ccw(c19.489,-29.298) 19.489,-29.214 cw(c19.489,-29.13) 19.405,-29.13 19.405,-29.087 19.405,-27.859 19.177,-27.631 19.177,-27.055 19.036,-26.913 19.036,-24.881 18.427,-24.273 18.427,-23.88 18.427,-23.836 ccw(c18.343,-23.836) 18.343,-23.752 18.176,-23.752 cw(c18.176,-23.668) 18.092,-23.668 18.092,-23.165 ccw(c18.008,-23.165) 18.008,-23.082 17.841,-23.082 cw(c17.841,-22.998) 17.757,-22.998 17.757,-21.796 cw(c17.841,-21.796) 17.841,-21.713 cw(c17.841,-21.796) 17.924,-21.796 17.924,-22.83 ccw(c18.008,-22.83) 18.008,-22.914 ccw(c18.008,-22.83) 18.092,-22.83 18.092,-21.633 cw(c18.176,-21.633) 18.116,-21.574 18.293,-21.398 cw(c18.352,-21.457) 18.411,-21.398 cw(c18.352,-21.457) 18.411,-21.516 18.284,-21.644 ccw(c18.343,-21.703) 18.26,-21.703 18.26,-23.501 ccw(c18.343,-23.501) 18.343,-23.584 ccw(c18.343,-23.501) 18.427,-23.501 18.427,-21.772 cw(c18.511,-21.772) 18.451,-21.713 18.62,-21.545 19.235,-20.93 19.235,-20.647 v1(19.304,-20.578)
  L8(SIG) w0.088: v1@13.271,-38.928 v1@13.462,-39.12 ; v1(13.455,-38.986) 13.475,-39.005 13.462,-39.018 v1@13.462,-39.12 ; v1(37.416,-35.632) 37.346,-35.701 37.346,-35.988 37.301,-36.034 37.301,-36.079 37.001,-36.379 37.001,-36.685 37.268,-36.952 37.336,-36.952 37.603,-37.22 37.603,-38.22 37.148,-38.674 37.148,-39.073 37.338,-39.263 37.338,-42.422 35.93,-43.829 35.93,-44.134 32.33,-47.735 14.592,-47.735 13.462,-46.605 13.462,-44.962 13.462,-44.917 ccw(c13.378,-44.917) 13.378,-44.833 13.21,-44.833 cw(c13.21,-44.749) 13.125,-44.749 13.125,-41.28 cw(c13.21,-41.28) 13.21,-41.196 cw(c13.21,-41.28) 13.294,-41.28 13.294,-44.581 ccw(c13.378,-44.581) 13.378,-44.665 ccw(c13.378,-44.581) 13.462,-44.581 13.462,-41.152 v1@13.462,-39.12
  L10(SIG) w0.103: R160.1@19.177,-19.837 19.227,-19.837 19.255,-19.865 19.255,-20.117 ; R160.1@19.263,-19.858 19.284,-19.878 19.284,-20.557 v1(19.304,-20.578)
DDR_VRN: R126.2 U7.G5 | length 17.5
  L1(SIG) w0.3: U7.G5@37.771,-30.484 37.807,-30.484 38.181,-30.11 v1(38.193,-30.11)
  L10(SIG) w0.1: R126.2@36.695,-43.565 36.822,-43.438 37.592,-43.438 39.37,-41.66 39.37,-38.911 40.754,-37.527 40.754,-35.126 40.725,-35.097 40.281,-34.653 39.84,-34.653 39.435,-34.248 39.435,-34.105 39.41,-34.08 39.41,-32.435 38.564,-31.589 38.564,-30.928 38.193,-30.556 v1(38.193,-30.11)
DDR_VRP: R127.1 U7.H5 | length 13.6
  L1(SIG) w0.3: v1(37.37,-30.908) 37.745,-31.284 U7.H5@37.755,-31.284
  L10(SIG) w0.1: R127.1@36.695,-42.295 36.703,-42.287 36.703,-41.533 37.643,-40.593 37.643,-35.759 37.666,-35.736 37.666,-35.529 37.643,-35.506 37.643,-34.636 38.338,-33.94 38.606,-33.94 38.688,-33.858 38.688,-32.67 38.559,-32.54 38.559,-32.366 38.198,-32.005 37.905,-32.005 37.846,-31.946 37.846,-31.654 37.37,-31.178 v1(37.37,-30.908)
DDR_ZQ1: R128.1 U14.L8 | length 4.4
  L1(SIG) w0.1: U14.L8@18.479,-26.839 18.068,-27.25 18.068,-28.573 19.035,-29.54 20.091,-29.54 R128.1@20.107,-29.556
DDR_ZQ2: R159.1 U15.L8 | length 3.8
  L1(SIG) w0.1: U15.L8@18.733,-43.501 18.804,-43.571 18.804,-43.827 19.118,-44.141 19.118,-45.411 19.841,-46.134 20.23,-46.134 R159.1@20.455,-46.359
DONE: J7.42 Q2.G R34.1 U7.R11 | length 33.9
  L1(SIG) w0.1: R34.1@41.298,-43.55 41.298,-42.699 40.595,-41.996 40.595,-39.154 40.84,-38.91 41.15,-38.91 41.395,-38.665 41.395,-37.554 41.615,-37.335 42.145,-37.335 U7.R11@42.57,-36.91
  L1(SIG) w0.2: v1(39.624,-44.708) 39.591,-44.675 39.591,-43.741 Q2.G@39.558,-43.708 39.693,-43.573 R34.1@41.275,-43.573 R34.1@41.298,-43.55
  L4(SIG) w0.2: v1(39.624,-44.708) 39.624,-47.833 49.403,-57.612 v1(49.403,-61.853)
  L10(SIG) w0.2: v1(49.403,-61.853) 49.422,-61.872 49.422,-63.439 J7.42@49.442,-63.459
EEPROM_DO: R50.1 R53.2 U9.4 | length 3.9
  L10(SIG) w0.2: U9.4@71.94,-50.042 71.944,-50.038 74.168,-50.038 75.815,-50.038 R50.1@75.819,-50.034
eFuse_EN: C8.2 J7.18 R5.1 U2.7 | length 34.9
  L4(SIG) w0.2: v1(59.055,-65.278) 59.563,-65.786 59.563,-66.675 ccw(c60.071,-66.675) 60.071,-67.183 81.28,-67.183 81.574,-66.889 81.574,-66.588 v1(80.899,-65.913)
  L10(SIG) w0.2: J7.18@59.042,-63.459 59.049,-63.465 59.049,-65.272 v1(59.055,-65.278) ; v1(80.899,-65.913) 81.407,-65.913 81.542,-66.048 R5.1@81.542,-66.675 C8.2@80.002,-66.675 80.002,-63.635 80.522,-63.115 U2.7@81.663,-63.115
eFuse_ILIM: R8.2 U2.5 | length 2
  L10(SIG) w0.2: U2.5@84.453,-63.615 84.557,-63.615 84.582,-63.64 84.582,-64.266 84.948,-64.632 84.948,-65.148 R8.2@85.082,-65.282
eFuse_SS: C9.2 U2.6 | length 2
  L10(SIG) w0.2: C9.2@81.415,-65.282 81.415,-64.512 81.661,-64.266 81.661,-63.64 81.636,-63.615 U2.6@81.567,-63.615 ; U2.6@81.542,-63.64 U2.6@81.567,-63.615 ; U2.6@81.663,-63.615 U2.6@81.567,-63.615
eFuse_VCP: R7.1 U2.4 | length 3.2
  L10(SIG) w0.2: 85.209,-63.115 U2.4@84.453,-63.115 86.111,-63.115 86.36,-63.363 R7.1@86.36,-63.762
EMMC_CLK: R94.1 U12.M6 | length 40.7
  L1(SIG) w0.103: v1(54.989,-13.03) 55.037,-13.03 55.282,-12.785 55.355,-12.785 U12.M6@55.634,-12.506
  L6(SIG) w0.088: v1(38.1,-23.626) 37.567,-23.093 37.567,-19.587 39.026,-18.128 39.057,-18.097 40.153,-17.001 ccw(c40.016,-16.864) 40.153,-16.727 ccw(c40.016,-16.864) 39.879,-16.727 39.056,-17.549 cw(c38.92,-17.412) 38.783,-17.549 38.234,-17 cw(c38.372,-16.864) 38.234,-16.727 40.222,-14.74 cw(c40.359,-14.877) 40.496,-14.74 cw(c40.359,-14.877) 40.496,-15.014 38.783,-16.727 ccw(c38.92,-16.864) 38.783,-17.001 ccw(c38.92,-16.864) 39.057,-17.001 43.345,-12.712 cw(c43.482,-12.85) 43.619,-12.713 43.893,-12.987 ccw(c44.03,-12.85) 44.167,-12.987 44.198,-12.956 44.704,-12.45 54.359,-12.45 54.939,-13.03 v1(54.989,-13.03)
  L10(SIG) w0.103: v1(38.1,-23.626) 38.862,-23.626 40.068,-24.831 40.068,-25.653 40.242,-25.828 40.242,-25.832 40.513,-26.103 R94.1@40.513,-26.166
EMMC_NRST: R91.2 R95.1 U12.K5 | length 13.3
  L1(SIG) w0.1: v1(50.651,-17.276) 50.673,-17.297 50.673,-18.321 51.427,-19.075 R91.2@51.427,-20.324 R95.1@51.427,-21.975 ; U12.K5@56.134,-13.506 56.608,-13.98 56.608,-14.321 v1(56.642,-14.355)
  L6(SIG) w0.1: v1(50.651,-17.276) 50.673,-17.276 52.331,-15.618 53.588,-14.361 54.539,-14.361 v1@56.636,-14.361
EMMC_VDDI: C111.1 C112.1 U12.C1 U12.C2 | length 4.5
  L1(SIG) w0.3: U12.C2@57.634,-17.006 U12.C1@58.134,-17.006 58.906,-17.006
  L1(SIG) w0.4: 58.906,-17.006 59.423,-17.006
  L1(SIG) w0.5: 59.423,-17.006 59.691,-17.006 59.995,-16.702 C112.1@61.921,-16.702 ; C111.1@60.464,-16.769 C111.1@60.514,-16.719
EN_1V0: R3.2 U1.7 | length 3.7
  L1(SIG) w0.2: R3.2@35.306,-61.099 35.933,-61.099 36.554,-60.477 36.554,-59.648 37.173,-59.029 37.655,-59.029 U1.7@37.68,-59.004
EN_1V8: R11.2 U3.7 | length 3.6
  L1(SIG) w0.2: R11.2@52.578,-61.861 52.578,-61.345 53.594,-60.329 53.594,-59.566 53.711,-59.449 U3.7@54.454,-59.449
EN_1V35: R16.2 U4.7 | length 3.7
  L1(SIG) w0.2: R16.2@17.526,-61.099 17.534,-61.091 18.161,-61.091 18.669,-60.583 18.669,-59.313 18.953,-59.029 19.572,-59.029 U4.7@19.597,-59.004
EN_3V3: R25.2 U6.7 | length 3.3
  L1(SIG) w0.2: R25.2@71.12,-62.107 71.12,-59.821 71.374,-59.567 71.379,-59.572 71.942,-59.572 U6.7@71.967,-59.597
EN_VTT: R17.1 R21.2 U5.2 | length 3.8
  L1(SIG) w0.2: U5.2@25.318,-8.965 25.35,-8.997 29.051,-8.997 R21.2@29.083,-9.029
ETH_CLK_25MHz: R146.1 U16.37 | length 6.4
  L1(SIG) w0.1: U16.37@72.58,-21.592 72.58,-23.231 74.753,-25.404 75.565,-25.404 75.646,-25.484 R146.1@75.646,-26.292
ETH_CLK_OUT: R149.1 U16.35 | length 4.9
  L1(SIG) w0.1: U16.35@71.792,-21.614 71.792,-22.393 71.99,-22.591 71.99,-24.415 72.431,-24.856 R149.1@72.431,-26.292
ETH_LED0: R144.2 R148.2 U16.32 | length 8.9
  L1(SIG) w0.1: R144.2@65.997,-26.284 66.005,-26.292 R148.2@67.61,-26.292 67.61,-25.694 68.171,-25.133 70.121,-25.133 70.714,-24.54 70.714,-23.886 70.574,-23.746 70.574,-21.698 70.592,-21.715 U16.32@70.592,-21.501
ETH_LED1: R151.1 U16.33 | length 5.9
  L1(SIG) w0.1: R151.1@69.217,-26.292 69.977,-26.292 70.358,-25.911 70.358,-25.531 70.932,-24.956 70.932,-22.962 70.986,-22.909 70.986,-21.624 U16.33@70.974,-21.612
ETH_LED2: R145.2 R152.2 U16.34 | length 7.9
  L1(SIG) w0.1: R145.2@70.739,-27.182 71.246,-27.182 71.682,-26.745 71.682,-22.791 71.401,-22.51 U16.34@71.401,-21.579 ; R152.2@70.747,-28.806 70.747,-27.342 R145.2@70.797,-27.292
ETH_LED_GR_K: J4.12 R148.1 | length 33
  L1(SIG) w0.2: R148.1@67.61,-27.292 67.719,-27.401 67.719,-27.958 v1(67.766,-28.005)
  L10(SIG) w0.2: v1(67.766,-28.005) 67.766,-28.572 67.825,-28.63 67.825,-28.657 69.454,-30.287 74.333,-30.287 74.644,-29.976 80.719,-29.976 81.398,-29.297 89.42,-29.297 J4.12@95.705,-23.012
ETH_LED_YL_K: J4.13 R152.1 | length 29.8
  L1(SIG) w0.2: R152.1@71.747,-28.806 71.763,-28.789 72.501,-28.789 v1(72.518,-28.772)
  L10(SIG) w0.2: v1(72.518,-28.772) 72.926,-28.364 72.926,-28.297 74.93,-26.293 84.254,-26.293 J4.13@95.705,-14.842
ETH_MDC: U7.C10 U16.13 | length 44.3
  L1(SIG) w0.2: U16.13@72.986,-16.77 72.986,-15.629 v1(73.011,-15.604)
  L1(SIG) w0.254: v1(41.37,-27.732) 41.37,-27.721 41.77,-27.321 U7.C10@41.77,-27.31
  L8(SIG) w0.1: v1(41.37,-27.732) 41.437,-27.799 41.743,-27.799 42.032,-28.088 42.256,-28.088 42.545,-28.377 42.545,-28.593 42.845,-28.893 44.484,-28.893 44.85,-29.258 44.85,-30.142 45.145,-30.437 45.595,-30.437 45.848,-30.184 45.848,-30.119 46.171,-29.796 49.817,-29.796 50.117,-30.097 58.326,-30.097 58.772,-29.65 60.269,-29.65 61.358,-28.562 64.154,-28.562 73.406,-19.31 73.406,-16.082 73.011,-15.687 v1(73.011,-15.604)
ETH_MDIO: R143.1 U7.C11 U16.14 | length 47.5
  L1(SIG) w0.2: U7.C11@42.57,-27.31 42.57,-27.307 42.978,-26.899 v1(42.978,-26.895) ; U16.14@72.586,-16.77 72.586,-15.044 72.746,-14.884 73.279,-14.884 73.892,-14.884 74.362,-14.414 74.362,-14.119 v1(74.386,-14.096)
  L8(SIG) w0.1: v1(42.978,-26.895) 42.975,-26.893 42.975,-25.822 42.932,-25.779 42.932,-22.106 44.587,-20.451 45.857,-20.451 55.763,-10.545 71.396,-10.545 74.386,-13.534 v1(74.386,-14.096)
ETH_NINT: R142.1 U7.E12 U16.31 | length 33.7
  L1(SIG) w0.1: U7.E12@43.37,-28.91 43.377,-28.91 43.775,-28.512 v1(43.781,-28.512) ; v1(70.17,-24.041) U16.31@70.17,-21.649
  L10(SIG) w0.1: v1(43.781,-28.512) 43.834,-28.565 44.156,-28.565 44.82,-29.229 44.82,-29.268 44.991,-29.439 45.747,-29.439 45.995,-29.687 46.834,-29.687 46.848,-29.673 47.159,-29.673 47.174,-29.687 49.5,-29.687 50.316,-30.503 55.607,-30.503 61.233,-24.877 65.56,-24.877 66.396,-24.041 v1(70.17,-24.041)
  L10(SIG) w0.2: R142.1@70.096,-24.769 70.133,-24.732 70.133,-24.078 v1(70.17,-24.041)
ETH_NRST: R96.1 U7.C17 U13.2 | length 10.2
  L1(SIG) w0.254: U7.C17@47.366,-27.314 47.366,-27.317 47.77,-27.721 v1(47.77,-27.732)
  L3(PWR) w0.1: v1(47.77,-27.732) 48.189,-28.151 48.189,-28.681 48.84,-29.332 49.146,-29.332 49.745,-29.932 49.98,-29.932 52.103,-32.056 v1(52.103,-32.5)
  L10(SIG) w0.2: R96.1@52.959,-32.508 53.024,-32.441 54.521,-32.441 54.574,-32.389 U13.2@54.759,-32.389
  L10(SIG) w0.254: v1(52.103,-32.5) 52.107,-32.504 52.954,-32.504 R96.1@52.959,-32.508
ETH_NRST_+3V3: R93.1 U13.4 U16.12 | length 27.4
  L1(SIG) w0.2: U16.12@73.386,-16.77 73.386,-15.807 v1(73.792,-15.401)
  L8(SIG) w0.1: v1(58.293,-29.599) 61.362,-26.529 61.761,-26.529 67.33,-20.961 67.33,-20.593 72.898,-15.025 73.349,-15.025 73.725,-15.401 v1(73.792,-15.401)
  L10(SIG) w0.2: U13.4@56.239,-31.889 R93.1@57.658,-31.889 57.665,-31.882 57.665,-30.227 v1(58.293,-29.599)
ETH_PHY_RXCLK: R138.1 U16.27 | length 5.2
  L1(SIG) w0.103: R138.1@64.762,-20.959 64.762,-20.909 65.601,-20.07 67.564,-20.07 67.853,-19.781 U16.27@69.457,-19.781
ETH_PHY_RXCLT: R137.1 U16.26 | length 4.8
  L1(SIG) w0.103: R137.1@64.762,-19.282 64.762,-19.32 64.823,-19.381 U16.26@69.457,-19.381
ETH_PHY_RXD0: R133.1 U16.25 | length 5.2
  L1(SIG) w0.103: R133.1@64.762,-17.657 64.889,-17.784 65.786,-17.784 66.983,-18.981 U16.25@69.457,-18.981
ETH_PHY_RXD1: R134.1 U16.24 | length 6.3
  L1(SIG) w0.103: R134.1@64.879,-16.085 R134.1@64.94,-16.085 ; R134.1@64.91,-16.125 64.91,-16.653 65.431,-17.175 66.014,-17.175 67.42,-18.581 U16.24@69.457,-18.581 ; R134.1@64.968,-16.125 R134.1@65.047,-16.125 ; R134.1@64.94,-16.085 R134.1@65.019,-16.085 ; R134.1@64.94,-16.085 R134.1@65.019,-16.085 ; R134.1@64.94,-16.085 R134.1@65.019,-16.085
ETH_PHY_RXD2: R135.1 U16.23 | length 4.2
  L1(SIG) w0.103: R135.1@66.421,-16.125 66.421,-16.641 67.961,-18.181 U16.23@69.457,-18.181
ETH_PHY_RXD3: R136.1 U16.22 | length 2.9
  L1(SIG) w0.103: R136.1@68.072,-16.125 68.072,-17.518 68.334,-17.781 U16.22@69.457,-17.781
ETH_PHY_TXCLK: R79.1 U16.20 | length 41.7
  L1(SIG) w0.103: R79.1@52.951,-26.674 53.125,-26.847 v1(54.689,-26.847) ; v1(69.723,-15.752) 70.186,-16.215 U16.20@70.186,-16.77
  L10(SIG) w0.103: v1(54.689,-26.847) 54.755,-26.781 54.755,-26.515 55.994,-25.275 56.031,-25.238 ccw(c55.853,-25.06) 56.031,-24.882 55.137,-23.988 cw(c55.315,-23.81) 55.137,-23.632 cw(c55.315,-23.81) 55.493,-23.632 56.447,-24.586 ccw(c56.625,-24.408) 56.803,-24.586 ccw(c56.625,-24.408) 56.803,-24.23 55.849,-23.276 cw(c56.027,-23.098) 55.849,-22.92 cw(c56.027,-23.098) 56.204,-22.92 57.159,-23.874 ccw(c57.337,-23.696) 57.515,-23.874 ccw(c57.337,-23.696) 57.515,-23.518 56.56,-22.564 cw(c56.738,-22.386) 56.56,-22.208 cw(c56.738,-22.386) 56.916,-22.208 57.871,-23.162 ccw(c58.049,-22.984) 58.227,-23.162 ccw(c58.049,-22.984) 58.227,-22.806 57.272,-21.852 cw(c57.45,-21.674) 57.272,-21.496 cw(c57.45,-21.674) 57.628,-21.496 58.583,-22.451 ccw(c58.761,-22.273) 58.939,-22.451 ccw(c58.761,-22.273) 58.939,-22.095 57.984,-21.14 cw(c58.162,-20.962) 57.984,-20.784 cw(c58.162,-20.962) 58.34,-20.784 59.295,-21.739 ccw(c59.473,-21.561) 59.651,-21.739 ccw(c59.473,-21.561) 59.651,-21.383 59.2,-20.932 cw(c59.378,-20.754) 59.2,-20.576 cw(c59.378,-20.754) 59.556,-20.576 59.947,-20.967 ccw(c60.125,-20.789) 60.303,-20.967 60.784,-20.486 60.784,-19.598 61.369,-19.012 61.993,-18.389 61.993,-18.199 64.715,-15.477 69.449,-15.477 v1(69.723,-15.752)
ETH_PHY_TXCLT: R85.1 U16.19 | length 38.7
  L1(SIG) w0.103: v1(70.451,-15.367) 70.451,-15.46 70.586,-15.595 U16.19@70.586,-16.77
  L10(SIG) w0.103: R85.1@51.808,-28.96 52.324,-28.96 54.196,-27.087 54.196,-22.388 54.763,-21.822 54.8,-21.785 ccw(c54.622,-21.607) 54.8,-21.429 53.969,-20.598 cw(c54.147,-20.42) 53.969,-20.242 cw(c54.147,-20.42) 54.325,-20.242 55.454,-21.371 ccw(c55.631,-21.193) 55.809,-21.371 ccw(c55.631,-21.193) 55.809,-21.015 54.681,-19.886 cw(c54.858,-19.708) 54.681,-19.53 cw(c54.858,-19.708) 55.036,-19.53 56.165,-20.659 ccw(c56.343,-20.481) 56.521,-20.659 ccw(c56.343,-20.481) 56.521,-20.303 55.742,-19.524 cw(c55.92,-19.346) 55.742,-19.168 cw(c55.92,-19.346) 56.098,-19.168 56.579,-19.649 ccw(c56.757,-19.471) 56.935,-19.649 59.089,-17.495 61.979,-14.605 69.944,-14.605 70.413,-15.074 70.413,-15.328 v1(70.451,-15.367)
ETH_PHY_TXD0: R80.1 U16.18 | length 37.4
  L1(SIG) w0.103: U16.18@70.986,-16.77 70.986,-15.834 70.855,-15.702 70.855,-14.206 70.993,-14.067 v1(70.993,-13.974)
  L10(SIG) w0.103: R80.1@51.808,-27.309 52.451,-27.309 53.086,-26.674 53.086,-22.606 52.689,-22.209 52.689,-20.307 54.831,-18.165 55.076,-18.165 55.268,-17.973 55.58,-17.973 55.772,-18.165 56.515,-18.165 58.293,-16.387 58.293,-15.401 58.293,-15.328 ccw(c57.863,-15.328) 58.167,-15.024 57.839,-14.696 cw(c58.017,-14.518) 57.839,-14.34 cw(c58.017,-14.518) 58.195,-14.34 59.245,-15.39 ccw(c59.423,-15.213) 59.601,-15.39 ccw(c59.423,-15.213) 59.601,-15.035 58.81,-14.243 cw(c58.988,-14.065) 58.81,-13.887 cw(c58.988,-14.065) 59.166,-13.887 ccw(c59.344,-13.709) 59.522,-13.887 59.824,-13.585 61.08,-13.585 70.605,-13.585 v1(70.993,-13.974)
ETH_PHY_TXD1: R81.1 U16.17 | length 40.7
  L1(SIG) w0.103: R81.1@52.951,-28.325 52.966,-28.339 v1(53.972,-28.339) ; v1(71.297,-15.611) 71.297,-15.705 71.386,-15.795 U16.17@71.386,-16.77
  L10(SIG) w0.103: v1(53.972,-28.339) 54.038,-28.406 54.339,-28.406 54.403,-28.47 54.449,-28.47 54.592,-28.47 55.038,-28.024 cw(c55.199,-28.184) 55.359,-28.024 55.576,-28.241 ccw(c55.736,-28.081) 55.896,-28.241 ccw(c55.736,-28.081) 55.896,-27.92 55.432,-27.456 cw(c55.593,-27.296) 55.432,-27.136 cw(c55.593,-27.296) 55.753,-27.136 56.217,-27.6 ccw(c56.377,-27.439) 56.538,-27.6 ccw(c56.377,-27.439) 56.538,-27.279 56.074,-26.815 cw(c56.234,-26.655) 56.074,-26.494 cw(c56.234,-26.655) 56.394,-26.494 56.858,-26.958 ccw(c57.019,-26.798) 57.179,-26.958 ccw(c57.019,-26.798) 57.179,-26.638 56.715,-26.174 cw(c56.875,-26.013) 56.715,-25.853 cw(c56.875,-26.013) 57.035,-25.853 57.5,-26.317 ccw(c57.66,-26.157) 57.82,-26.317 ccw(c57.66,-26.157) 57.82,-25.997 57.356,-25.532 cw(c57.516,-25.372) 57.356,-25.212 cw(c57.516,-25.372) 57.677,-25.212 58.141,-25.676 ccw(c58.301,-25.516) 58.461,-25.676 ccw(c58.301,-25.516) 58.461,-25.355 57.997,-24.891 cw(c58.158,-24.731) 57.997,-24.571 cw(c58.158,-24.731) 58.318,-24.571 58.782,-25.035 ccw(c58.942,-24.874) 59.103,-25.035 ccw(c58.942,-24.874) 59.103,-24.714 58.639,-24.25 cw(c58.799,-24.09) 58.639,-23.929 cw(c58.799,-24.09) 58.959,-23.929 59.423,-24.394 ccw(c59.584,-24.233) 59.744,-24.394 ccw(c59.584,-24.233) 59.744,-24.073 59.28,-23.609 cw(c59.44,-23.449) 59.28,-23.288 cw(c59.44,-23.449) 59.6,-23.288 60.064,-23.752 ccw(c60.225,-23.592) 60.385,-23.752 ccw(c60.225,-23.592) 60.385,-23.432 59.921,-22.968 cw(c60.081,-22.807) 59.921,-22.647 cw(c60.081,-22.807) 60.242,-22.647 60.577,-22.983 ccw(c60.738,-22.822) 60.898,-22.983 ccw(c60.738,-22.822) 60.898,-22.662 60.81,-22.574 cw(c60.97,-22.413) 60.81,-22.253 62.104,-20.959 62.104,-20.541 62.104,-20.323 65.917,-16.51 70.398,-16.51 v1(71.297,-15.611)
ETH_PHY_TXD2: R83.1 U16.16 | length 42
  L1(SIG) w0.103: v1(71.755,-12.323) 71.755,-14.887 71.786,-14.919 U16.16@71.786,-16.77
  L10(SIG) w0.103: R83.1@45.204,-26.166 R83.1@45.377,-25.992 ; R83.1@45.336,-26.166 45.336,-26.128 45.582,-25.882 45.619,-25.882 46.225,-25.277 46.749,-25.277 48.641,-23.384 48.641,-23.372 49.403,-22.61 49.403,-17.653 50.927,-16.129 50.927,-13.593 53.024,-11.496 65.57,-11.496 66.396,-12.323 v1(71.755,-12.323)
ETH_PHY_TXD3: R84.1 U16.15 | length 40.6
  L1(SIG) w0.103: v1(52.455,-23.691) 52.455,-23.757 52.951,-24.253 R84.1@52.951,-25.023 ; v1(72.136,-14.736) 72.161,-14.761 U16.15@72.161,-16.745
  L10(SIG) w0.103: v1(52.455,-23.691) 52.362,-23.691 52.173,-23.88 51.816,-23.88 51.249,-23.313 51.212,-23.276 ccw(c51.07,-23.419) 50.927,-23.276 cw(c50.785,-23.133) 50.642,-23.276 50.455,-23.089 cw(c50.598,-22.947) 50.397,-22.947 50.397,-20.072 cw(c50.598,-20.072) 50.598,-19.87 cw(c50.598,-20.072) 50.8,-20.072 50.8,-22.237 ccw(c51.002,-22.237) 51.002,-22.438 ccw(c51.002,-22.237) 51.203,-22.237 51.203,-19.685 cw(c51.405,-19.685) 51.262,-19.543 51.845,-18.96 ccw(c51.702,-18.818) 51.844,-18.675 cw(c51.987,-18.533) 51.845,-18.39 51.881,-18.353 54.453,-15.782 57.531,-12.704 63.626,-12.704 63.88,-12.958 71.12,-12.958 72.136,-13.974 v1(72.136,-14.736)
ETH_REG_OUT: L5.1 U16.30 | length 2.3
  L1(SIG) w0.5: L5.1@69.515,-23.507 69.515,-21.163
ETH_RSET: R150.1 U16.39 | length 3.9
  L1(SIG) w0.1: U16.39@73.393,-21.566 73.393,-23.257 74.645,-24.508 74.932,-24.508 R150.1@75.065,-24.642
ETH_RXCLK: R138.2 R140.2 U7.B17 | length 37.3
  L1(SIG) w0.103: U7.B17@47.37,-26.51 47.38,-26.51 47.781,-26.911 v1(47.791,-26.911) ; v1(61.358,-20.985) 62.163,-20.985 R140.2@62.239,-20.909 ; R140.2@62.217,-20.967 63.754,-20.967 R138.2@63.762,-20.959
  L8(SIG) w0.088: v1(47.791,-26.911) 52.313,-22.483 ; 52.314,-22.484 53.207,-21.59 53.594,-21.59 53.638,-21.59 ccw(c53.638,-21.396) 53.832,-21.396 53.832,-20.734 cw(c54.026,-20.734) 54.026,-20.54 cw(c54.026,-20.734) 54.221,-20.734 54.221,-22.446 ccw(c54.415,-22.446) 54.415,-22.64 ccw(c54.415,-22.446) 54.609,-22.446 54.609,-20.734 cw(c54.803,-20.734) 54.803,-20.54 cw(c54.803,-20.734) 54.997,-20.734 54.997,-22.446 ccw(c55.191,-22.446) 55.191,-22.64 ccw(c55.191,-22.446) 55.385,-22.446 55.385,-20.734 cw(c55.579,-20.734) 55.579,-20.54 cw(c55.579,-20.734) 55.774,-20.734 55.774,-22.446 ccw(c55.968,-22.446) 55.968,-22.64 ccw(c55.968,-22.446) 56.162,-22.446 56.162,-20.734 cw(c56.356,-20.734) 56.356,-20.54 cw(c56.356,-20.734) 56.55,-20.734 56.55,-22.446 ccw(c56.744,-22.446) 56.744,-22.64 ccw(c56.744,-22.446) 56.938,-22.446 56.938,-21.384 cw(c57.133,-21.384) 57.133,-21.19 cw(c57.133,-21.384) 57.327,-21.384 57.327,-22.446 ccw(c57.521,-22.446) 57.521,-22.64 ccw(c57.521,-22.446) 57.715,-22.446 57.715,-21.784 cw(c57.909,-21.784) 57.909,-21.59 58.674,-21.59 59.184,-21.59 60.139,-20.635 61.1,-20.635 61.358,-20.893 v1(61.358,-20.985)
ETH_RXCLT: R137.2 R139.2 U7.D13 | length 37.7
  L1(SIG) w0.103: v1(43.832,-27.746) 43.832,-27.759 44.17,-28.097 U7.D13@44.17,-28.11 ; R139.2@61.965,-19.24 62.006,-19.24 62.048,-19.282 R137.2@63.762,-19.282 ; R139.2@62.166,-19.155 62.163,-19.152 62.163,-18.697 62.369,-18.49 v1(62.369,-18.397)
  L8(SIG) w0.088: v1(43.832,-27.746) 43.561,-27.475 43.561,-26.166 44.056,-25.67 47.402,-25.67 47.439,-25.67 47.49,-25.619 52.802,-20.204 cw(c53.066,-20.463) 52.812,-20.195 54.665,-18.443 cw(c54.726,-18.507) 54.726,-18.419 54.971,-18.419 55.271,-18.719 55.577,-18.719 55.793,-18.503 55.793,-18.467 55.841,-18.419 56.679,-18.419 57.111,-18.419 cw(c57.111,-18.613) 57.305,-18.613 57.305,-20.036 ccw(c57.5,-20.036) 57.5,-20.231 ccw(c57.5,-20.036) 57.694,-20.036 57.694,-18.325 cw(c57.888,-18.325) 57.888,-18.131 cw(c57.888,-18.325) 58.082,-18.325 58.082,-20.036 ccw(c58.276,-20.036) 58.276,-20.231 ccw(c58.276,-20.036) 58.47,-20.036 58.47,-18.325 cw(c58.664,-18.325) 58.664,-18.131 cw(c58.664,-18.325) 58.859,-18.325 58.859,-18.996 ccw(c59.053,-18.996) 59.053,-19.19 ccw(c59.053,-18.996) 59.247,-18.996 59.247,-18.325 cw(c59.441,-18.325) 59.441,-18.131 cw(c59.441,-18.325) 59.635,-18.325 59.635,-18.918 ccw(c59.829,-18.918) 59.829,-19.112 ccw(c59.829,-18.918) 60.023,-18.918 60.023,-18.613 cw(c60.217,-18.613) 60.217,-18.419 61.976,-18.419 62.347,-18.419 v1(62.369,-18.397)
ETH_RXD0: R129.1 R133.2 U7.D11 | length 37.1
  L1(SIG) w0.103: v1(42.166,-27.691) 42.166,-27.698 42.57,-28.103 U7.D11@42.57,-28.11 ; v1(62.639,-16.174) 63.132,-16.174 63.168,-16.137 R129.1@63.168,-16.125 ; R129.1@63.112,-16.181 R129.1@63.168,-16.125 ; R129.1@63.119,-16.189 63.119,-16.514 63.762,-17.157 R133.2@63.762,-17.657 ; R129.1@63.429,-16.125 R129.1@63.168,-16.125
  L8(SIG) w0.088: v1(42.166,-27.691) 42.176,-27.702 42.418,-27.702 42.826,-28.11 42.958,-28.11 ccw(c42.98,-27.742) 42.982,-28.111 43.077,-28.111 43.945,-28.116 43.984,-28.116 44.201,-27.899 44.201,-26.779 44.411,-26.569 44.437,-26.543 45.346,-26.54 cw(c45.347,-26.91) 45.35,-26.54 45.689,-26.543 45.762,-26.543 45.765,-26.54 47.091,-26.54 47.175,-26.589 cw(c46.993,-26.91) 47.311,-26.723 47.365,-26.814 47.365,-27.006 47.638,-27.28 50.829,-27.28 51.943,-26.166 52.451,-26.166 52.495,-26.166 ccw(c52.495,-25.971) 52.689,-25.971 cw(c52.883,-25.971) 52.883,-25.777 53.854,-25.777 cw(c53.854,-25.971) 54.048,-25.971 cw(c53.854,-25.971) 53.854,-26.166 53.272,-26.166 ccw(c53.272,-26.36) 53.078,-26.36 ccw(c53.272,-26.36) 53.272,-26.554 55.99,-26.554 ccw(c55.99,-26.36) 56.184,-26.36 56.184,-26.251 cw(c56.378,-26.251) 56.241,-26.114 56.354,-26.001 59.364,-22.991 61.052,-22.991 61.981,-22.137 ccw(c61.731,-21.865) 61.996,-22.122 63.807,-20.271 63.807,-17.341 v1(62.639,-16.174)
ETH_RXD1: R130.1 R134.2 U7.A16 | length 36.4
  L1(SIG) w0.103: U7.A16@46.57,-25.71 46.581,-25.698 46.581,-24.911 v1(46.593,-24.9) ; v1(61.951,-13.967) 61.951,-13.873 62.164,-13.661 ; 62.164,-13.66 62.292,-13.531 R130.1@63.119,-13.531 63.153,-13.565 63.153,-13.925 64.353,-15.125 R134.2@64.77,-15.125
  L8(SIG) w0.088: v1(46.593,-24.9) 50.906,-20.77 50.929,-20.747 50.981,-20.695 52.827,-18.939 cw(c52.888,-19.003) 52.869,-18.917 ccw(c52.851,-18.83) 52.908,-18.898 ccw(c50.838,-16.496) 53.367,-18.409 54.392,-17.052 54.396,-17.047 54.422,-17.022 56.2,-17.022 56.329,-16.892 56.337,-16.892 56.553,-16.676 56.553,-16.668 56.607,-16.615 56.84,-16.615 56.884,-16.615 ccw(c56.884,-16.421) 57.078,-16.421 57.078,-15.251 cw(c57.272,-15.251) 57.272,-15.057 cw(c57.272,-15.251) 57.466,-15.251 57.466,-16.963 ccw(c57.66,-16.963) 57.66,-17.157 ccw(c57.66,-16.963) 57.855,-16.963 57.855,-15.251 cw(c58.049,-15.251) 58.049,-15.057 cw(c58.049,-15.251) 58.243,-15.251 58.243,-16.963 ccw(c58.437,-16.963) 58.437,-17.157 ccw(c58.437,-16.963) 58.631,-16.963 58.631,-15.251 cw(c58.825,-15.251) 58.825,-15.057 cw(c58.825,-15.251) 59.019,-15.251 59.019,-16.963 ccw(c59.213,-16.963) 59.213,-17.157 ccw(c59.213,-16.963) 59.408,-16.963 59.408,-16.809 cw(c59.602,-16.809) 59.602,-16.615 59.843,-16.615 60.706,-15.752 61.83,-14.628 61.83,-14.369 61.882,-14.317 61.882,-14.036 v1(61.951,-13.967)
ETH_RXD2: R131.1 R135.2 R141.2 U7.F15 | length 39.2
  L1(SIG) w0.103: v1(45.392,-30.062) 45.405,-30.062 45.757,-29.71 U7.F15@45.77,-29.71 ; R131.1@64.793,-13.531 64.807,-13.545 v1(64.807,-14.228) ; R131.1@64.868,-13.502 R131.1@64.868,-13.466 ; R131.1@64.897,-13.458 64.934,-13.494 66.384,-13.494 R141.2@66.421,-13.531 R135.2@66.421,-15.125 ; R141.2@66.137,-13.284 R141.2@66.384,-13.531
  L8(SIG) w0.088: v1(45.392,-30.062) 45.44,-30.062 45.906,-29.596 45.906,-29.211 46.222,-28.895 46.661,-28.895 48.566,-28.897 57.132,-28.895 57.158,-28.869 58.188,-27.839 58.22,-27.807 ccw(c58.082,-27.67) 58.219,-27.533 cw(c58.357,-27.396) 58.219,-27.259 58.95,-26.528 cw(c59.087,-26.665) 59.224,-26.528 cw(c59.087,-26.665) 59.224,-26.802 58.768,-27.258 ccw(c58.906,-27.396) 58.768,-27.533 ccw(c58.906,-27.396) 59.043,-27.533 61.142,-25.434 ccw(c61.004,-25.297) 61.141,-25.16 cw(c61.279,-25.023) 61.141,-24.886 61.173,-24.854 66.268,-19.759 66.268,-15.689 v1(64.807,-14.228)